# Altium PCB MCP73831-BREAKOUT.PcbDoc
Units mm, origin at the board's own origin, x right, y up, seen from the top; angles counter-clockwise.
Board outline 17.7 x 15.3 mm, 2 copper layers (Top Layer, Bottom Layer), stack 1.57 mm thick; 9 components, 7 nets, 38 pads, 7 vias.
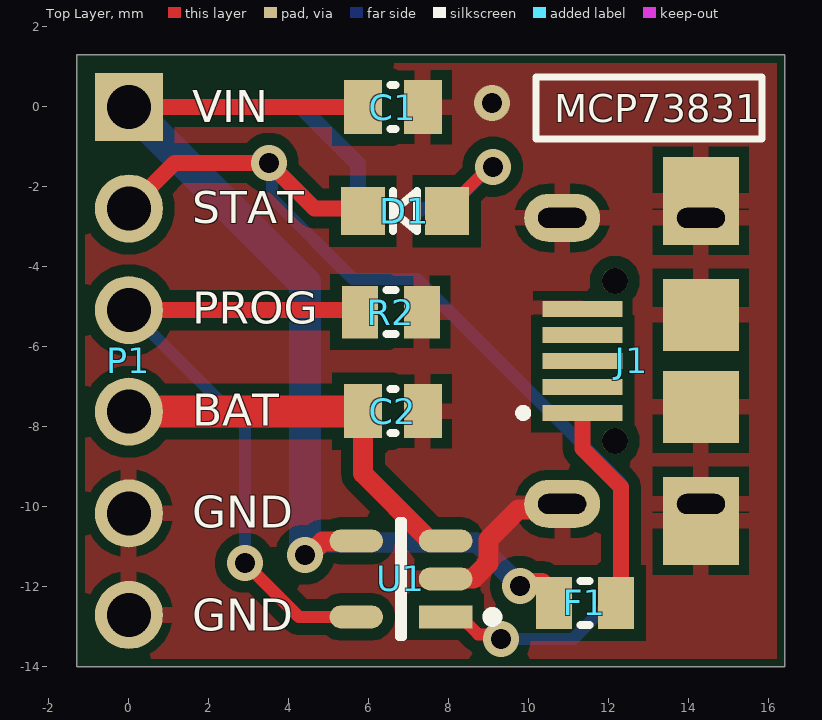
[diagram p0: Top Layer view]
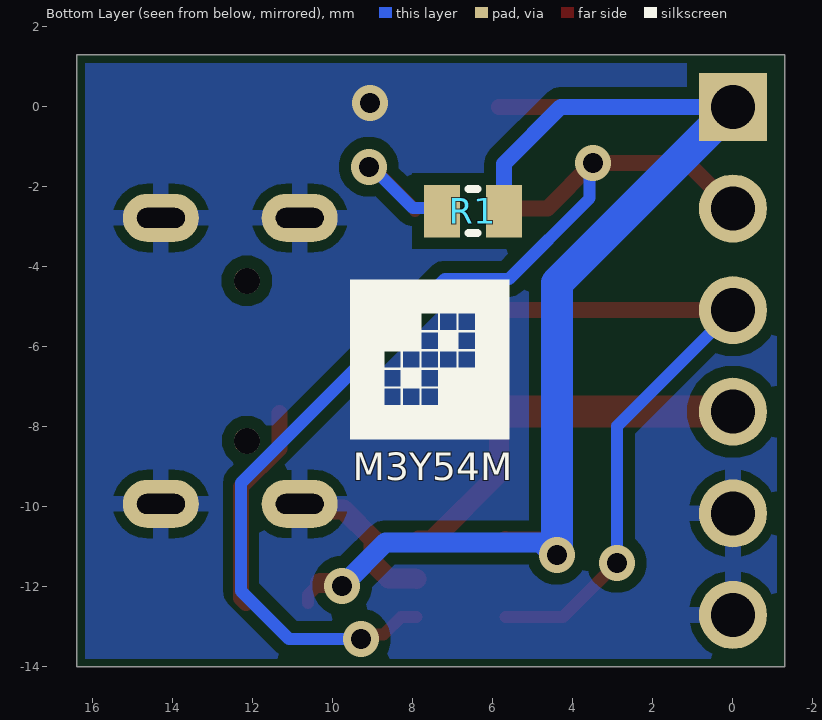
[diagram p1: Bottom Layer view, seen from below]
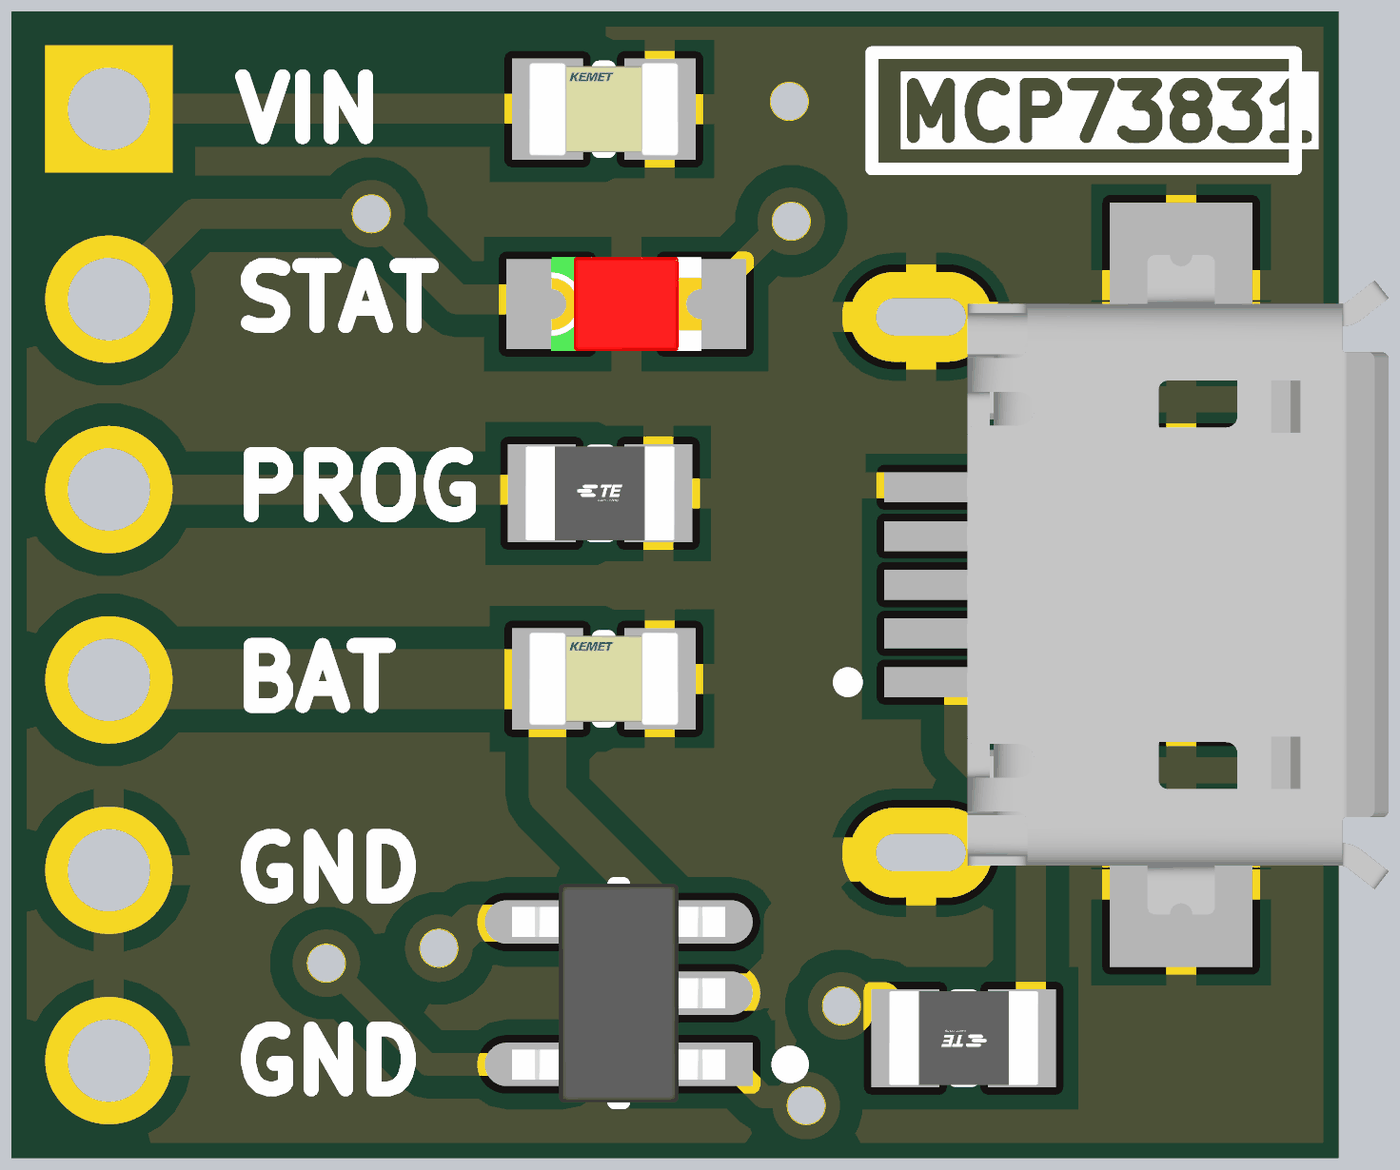
[diagram p2: 3D render of the assembled board from above, using the file's embedded part models]

## Layer stack, top to bottom
Top Solder: solder mask 0.015, Solder Resist, Dk 3.5
Top Layer: signal copper 0.035
Dielectric 1: dielectric 1.5, FR-4, Dk 4.2
Bottom Layer: signal copper 0.035
Bottom Solder: solder mask 0.015, Solder Resist, Dk 3.5

## Board outline
-1.3,-14 -1.3,1.3 16.4,1.3 16.4,-14

## Design rules (kind name [scope] priority, off if disabled: settings)
BoardOutlineClearance [All] p1: gap=0.2 ignorepadtopadclearanceinfootprint=FALSE
Clearance Clearance_Polygon_Fiducials [All vs InComponent('FID?')] p1: gap=1.3 ignorepadtopadclearanceinfootprint=FALSE
Clearance Clearance_Polygon [InPolygon] p2: gap=0.3 ignorepadtopadclearanceinfootprint=FALSE
Clearance [All] p3: gap=0.15 ignorepadtopadclearanceinfootprint=FALSE except(0: Arc-Hole Track-Hole SMDPad-Hole THPad-Hole Via-Hole Fill-Hole Poly-Hole Region-Hole Text-Hole)
HoleSize [All] p1: absolutevalues=TRUE maxlimit=3.5 minlimit=0.3 maxpercent=80.000 minpercent=20.000
MinimumSolderMaskSliver [All] p1: minsoldermaskwidth=0.15
PolygonConnect PolygonConnect_Via [IsVia] p1: connectstyle=Direct reliefconductorwidth=0.4 reliefentries=4 polygonreliefangle="90 Angle" airgapwidth=0.25
PolygonConnect [All] p2: connectstyle=Relief reliefconductorwidth=0.4 reliefentries=4 polygonreliefangle="90 Angle" airgapwidth=0.25
RoutingVias [All] p1: holewidth=0.4 width=0.7 viastyle="Through Hole" minholewidth=0.4 minwidth=0.6 maxholewidth=2 maxwidth=3
SilkToSilkClearance [All] p1: silktosilkclearance=0.15
SilkToSolderMaskClearance [IsPad] p1: minsilkscreentomaskgap=0.1 clearancetoexposedcopper=TRUE
SolderMaskExpansion SolderMaskExpansion_Via [IsVia] p1: expansion=0.102 istentingtop=TRUE soldermaskfromhole=TRUE
SolderMaskExpansion [All] p2: expansion=0.102 istentingtop=FALSE
Width [All] p1: maxlimit=2 minlimit=0.25 preferedwidth=0.3
26 further rules are at their usual default settings.

## Components (designator, comment, footprint, x,y, rotation, side; value= is the part's Value field where it differs from the comment)
C1 "C0805C104K5RAC7411" C0805 6.6,-0.005 r0 top value=10uF_16V
C2 "C0805C104K5RAC7411" C0805 6.6,-7.605 r0 top value=10uF_16V
D1 "LED-RED" LED0805 6.9,-2.605 r0 top
F1 "MF-PSMF050X-2" R0805 11.4,-12.4 r180 top value=500mA_6V_PTC
J1 "629105150921" CON-MICRO-USB-B-SMD-WITH-HOLDER 14.3,-6.35 r90 top
P1 "CON-HDR-1X6" CON-HDR-1X6-2.54 0,0 r270 top
R1 "CRG0805F10K" R0805 6.5,-2.605 r180 bottom value=2.2K
R2 "CRG0805F10K" R0805 6.55,-5.13 r0 top value=47K
U1 "MCP73831T-2ACI/OT" SOT-23-5 6.8,-11.8 r180 top

## Footprints (in the part's own frame and the unit in brackets; to place one, negate y for a bottom-side part, rotate by r counter-clockwise, add the part's x,y. Pads: shape width x height; smd on the part's side, far side on the other; paste and mask are expansions set on the pad)
C0805 [mm] "FP-C0805C-DN-MFG"
  rect 0.95x1.35 smd: 1(-0.75,0) 2(0.75,0)
  silkscreen extent -0.06,-0.55 0.06,0.55, body extent -1.4,-0.85 1.4,0.85, height 0.25
CON-HDR-1X6-2.54 [mm] "Connector; Header; 6 Position, 2.54 Pitch"
  rect 1.7x1.7 hole 1.1 paste-1000 mask+0: 1(0,0)
  round 1.7 hole 1.1 paste-1000 mask+0: 2(2.54,0) 3(5.08,0) 4(7.62,0) 5(10.16,0) 6(12.7,0)
CON-MICRO-USB-B-SMD-WITH-HOLDER [mm] "MICRO USB 5P female seat B type 7.2 four-pin board foot length 1.3 with column curling"
  rect 0.4x2 smd: 1(-1.3,2.96) 2(-0.65,2.96) 3(0,2.96) 4(0.65,2.96) 5(1.3,2.96)
  rect 2.2x1.9 smd: Shell(-4,0) Shell(4,0)
  oval 1.2x1.9 hole 0.5 slot 1.2 at 90 deg: Shell(-3.575,0) Shell(-3.575,3.47) Shell(3.575,0) Shell(3.575,3.47)
  rect 1.8x1.9 smd: Shell(-1.15,0) Shell(1.15,0)
  round 0.65 hole 0.65 paste+0 mask+0: ""(-2,2.15) ""(2,2.15)
  silkscreen extent -1.4,4.35 -1.2,4.54, body extent -4.4,-2.77 4.4,2.86, height 2.79
LED0805 [mm]
  rect 1.1x1.2 smd: 1(1.05,0) 2(-1.05,0)
  silkscreen extent -0.3,-0.5 0.3,0.5, body extent -1.7,-0.77 1.7,0.77, height 0.25
R0805 [mm] "FP-CRG0805-IPC_C"
  rect 0.906x1.307 smd: 1(-0.776,0) 2(0.776,0)
  silkscreen extent -0.11,-0.55 0.11,0.55, body extent -1.33,-0.8 1.33,0.8, height 0.25
SOT-23-5 [mm]
  rect 1.338x0.578 smd: 1(-1.116,0.95)
  rrect100% 1.338x0.578 smd: 2(-1.116,0) 3(-1.116,-0.95) 4(1.116,-0.95) 5(1.116,0.95)
  silkscreen extent -2.41,-1.45 0.05,1.45, body extent -1.42,-1.46 1.42,1.46, height 1.08

## Part data
C1 C2: library part CAPACITOR, "C0805 0.10 μF X7R 30ppm/°C 10.00% 50 V", Capacitance=100nF, Manufacturer=KEMET, Package=C0805C-DN, Temperature="-55°C to +125°C", Temperature Characteristic=X7R, Temperature Coefficient=30ppm/°C, Temperature Range High=+125°C, Temperature Range Low=-55°C, Tolerance=0.1, Voltage Rating="50 V", Automotive=No, Category=Cap, ComponentLink2Description=Datasheet, ComponentLink2URL=https://content.kemet.com/datasheets/KEM_C1003_C0G_SMD.pdf, Device Class L1="Passive Components", Device Class L2=Capacitors, Device Class L3="Ceramic Capacitors", Height=0.88mm, Ipc Land Pattern Name=CAPC200125X78, Lead Free=Yes, Manufacturer Part Number=C0805C104K5RAC7411, Material=Ceramic, Octopart=https://octopart.com/c0805c104k5rac7411-kemet-18508045, RoHS=TRUE
D1: library part LED, "Typical LED"
F1: library part FUSE-PTC, "FUSE 500MA SMD (0805) RESETABLE"
J1: library part CON-MICRO-USB-AB-RCPT-SMD, "Micro USB 2.0 Type AB Receptacle WR-COM, Horizontal, SMT", Contact Resistance=30mOhm, Manufacturer="Wurth Elektronik", Operating Temperature=-40to85degC, Rated Current=1.8A, Working Voltage=30VAC, Connector Type=MicroUSB2.0TypeAB, Datasheet URL=https://katalog.we-online.de/em/datasheet/629105150921.pdf, Gender=Receptacle, Manufacturer URL=http://www.we-online.de, Mounting Technology=SMT, Orientation=Horizontal, Package Reference=629105150921, Packaging=TapeandReel, Part Number=629105150921, Publisher=WurthElektronik
P1: "Pin Header, 6-Pin", LatestRevisionDate=17-Jul-2002, LatestRevisionNote="Re-released for DXP Platform.", Publisher="Altium Limited"
R1 R2: library part RESISTOR, "RES SMD 10K OHM 1% 1/8W 0805", Case/Package=0805, Max Operating Temperature=125°C, Min Operating Temperature=-55°C, Number of Resistors=1, Power Rating=125mW, Resistor Type="Thick Film", Temperature Coefficient=100ppm/°C, Tolerance=1%, Voltage Rating=150V, Depth=1.25mm, ELV=Compliant, Height=0.55mm, Length=2mm, Mount="Surface Mount", Number of Terminations=2, Packaging="Tape and Reel", Radiation Hardening=No, RoHS Compliant=Yes, Series="CRG Series", Technology="THICK FILM", Termination=Solder
U1: library part MCP73831T, "IC CONTROLLR LI-ION 4.2V SOT23-5", Case/Package=SOT-23, Drain to Source Resistance=350mR, Max Charge Current=500mA, Max Input Voltage=6V, Max Operating Temperature=85°C, Max Output Voltage=4.5V, Max Power Dissipation=1.54W, Min Operating Temperature=-40°C, Min Output Voltage=4.168V, Min Supply Voltage=3.75V, Output Voltage=4.2V, Voltage Rating=4.534V, Contact Plating=Tin, Height=0.051inch, Lead Free="Lead Free", Length=0.122inch, Max Supply Voltage=6V, Mount="Surface Mount", Number of Cells=1, Number Of Channels=1, Number of Outputs=1, Number of Pins=5, Output Current=500mA, Packaging="Tape and Reel", Radiation Hardening=No, REACH SVHC="No SVHC", Termination=SMD/SMT, Weight=0.00709oz, Width=0.071inch

## Via types
v1: diameter 0.9, hole 0.5, Top Layer to Bottom Layer, tented both sides, 7 vias

## Nets (pads, with @x,y where several pads share a name; then routed paths per layer and width w, separated by ;. In a path a pad name is that pad's centre, name@x,y a point inside that pad or via, vN(x,y) a via of type N, cw(c..) or ccw(c..) an arc to the next point about the centre after c; other vN are vias at no path point)
+5V: C1.1 F1.2 P1.1 R1.2 U1.4 | length 35
  Top Layer w0.3: F1.2@10.321,-11.9 10.624,-12.203 F1.2
  Top Layer w0.4: P1.1 5.845,0 C1.1
  Top Layer w0.5: v1(4.4,-11.2) 4.508,-11.2 4.843,-10.865 5.669,-10.865 U1.4 ; v1(9.771,-11.971) 9.841,-11.9 F1.2@10.321,-11.9
  Bottom Layer w0.4: P1.1 4.3,0 5.724,-1.424 R1.2
  Bottom Layer w0.5: v1(4.4,-11.2) 4.508,-11.2 4.819,-10.889 8.689,-10.889 v1(9.771,-11.971)
  Bottom Layer w0.8: P1.1 4.4,-4.4 v1(4.4,-11.2)
GND: C1.2 C2.2 J1.5 J1.Shell P1.5 P1.6 R2.2 U1.2 | length 4
  Top Layer w0.5: U1.2 7.931,-11.785 8.609,-11.785 8.985,-11.408 8.985,-10.813 9.74,-10.059 10.696,-10.059 J1.Shell@10.83,-9.925
  other v1: 9.075,0.1
NetD1_1: D1.1 R1.1 | length 3.9
  Top Layer w0.3: D1.1 7.95,-2.555 9.005,-1.5 v1(9.1,-1.5)
  Bottom Layer w0.3: R1.1 7.354,-2.527 8.003,-2.527 9.03,-1.5 v1(9.1,-1.5)
NetF1_1: F1.1 J1.1 | length 5.2
  Top Layer w0.4: J1.1 11.34,-8.54 12.3,-9.5 12.3,-12.276 F1.1
PROG: P1.3 R2.1 U1.5 | length 16.7
  Top Layer w0.3: v1(2.9,-11.4) 4.25,-12.75 U1.5
  Top Layer w0.4: P1.3 5.724,-5.08 R2.1
  Bottom Layer w0.3: P1.3 2.9,-7.98 v1(2.9,-11.4)
STAT: D1.2 P1.2 U1.1 | length 27.2
  Top Layer w0.3: U1.1 8.296,-12.75 8.732,-13.185 9.185,-13.185 v1(9.3,-13.3)
  Top Layer w0.4: P1.2 1.14,-1.4 v1(3.5,-1.4) 4.64,-2.54 5.785,-2.54 D1.2
  Bottom Layer w0.3: v1(3.5,-1.4) 3.58,-1.48 3.58,-2.28 5.6,-4.3 7.2,-4.3 12.3,-9.4 12.3,-12.1 11.1,-13.3 v1(9.3,-13.3)
VBAT: C2.1 P1.4 U1.3 | length 10.2
  Top Layer w0.4: U1.3@7.478,-10.792 7.858,-10.792 U1.3
  Top Layer w0.5: C2.1 5.85,-9.164 U1.3@7.478,-10.792
  Top Layer w0.8: P1.4 0.008,-7.612 5.843,-7.612 C2.1
pads on no net: J1. J1.2 J1.3 J1.4

## Polygon pours and split planes (outlines as drawn)
GND on Bottom Layer "GND_L02_P001" (solid, remove dead copper, pour order 1): -1.3,-14 -1.3,1.3 16.4,1.3 16.4,-14
GND on Top Layer "GND_L01_P000" (solid, remove dead copper, pour order 0): -1.3,-14 -1.3,1.3 16.4,1.3 16.4,-14

## Silkscreen, mask and mechanical layers (free items; w line width, h text height)
Top Overlay:
  lines w0.17: 10.175,-0.8 10.175,0.75 15.825,0.75 15.825,-0.8 10.175,-0.8
  text "VIN" at 1.577,-0.381 h0.8
  text "MCP73831" at 10.634,-0.38 h0.7
  text "STAT" at 1.577,-2.903 h0.8
  text "PROG" at 1.577,-5.424 h0.8
  text "BAT" at 1.577,-7.971 h0.8
  text "GND" at 1.577,-10.517 h0.8
  text "GND" at 1.577,-13.089 h0.8
Bottom Overlay:
  region: 603 vertices and 15 holes, not listed, extent 5.593,-8.305 9.573,-4.324
  text "M3Y54M" at 9.502,-9.335 h0.68
Mechanical 1:
  the board outline again, w0.1
Mechanical 13:
  lines w0.1: -1.3,-14 -1.3,-14

## Text inside footprints (layer, text, board x,y; h text height)
J1: Top 3D Body "PCB Edge" at 16.078,-7.874 h0.41 r90